# Altium PCB Secondary Protection.PcbDoc
Units mil, origin at the board's own origin, x right, y up, seen from the top; angles counter-clockwise.
Board outline 810 x 4415 mil, 2 copper layers (Top Layer, Bottom Layer), stack 62 mil thick; 47 components, 39 nets, 131 pads, 15 vias.
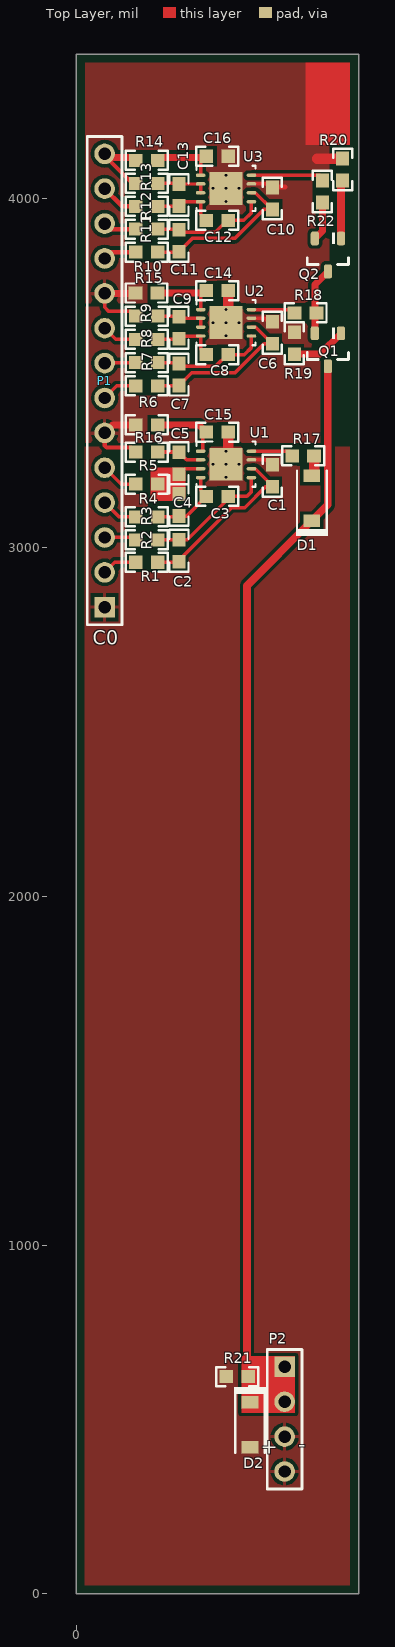
[diagram p0: Top Layer view]
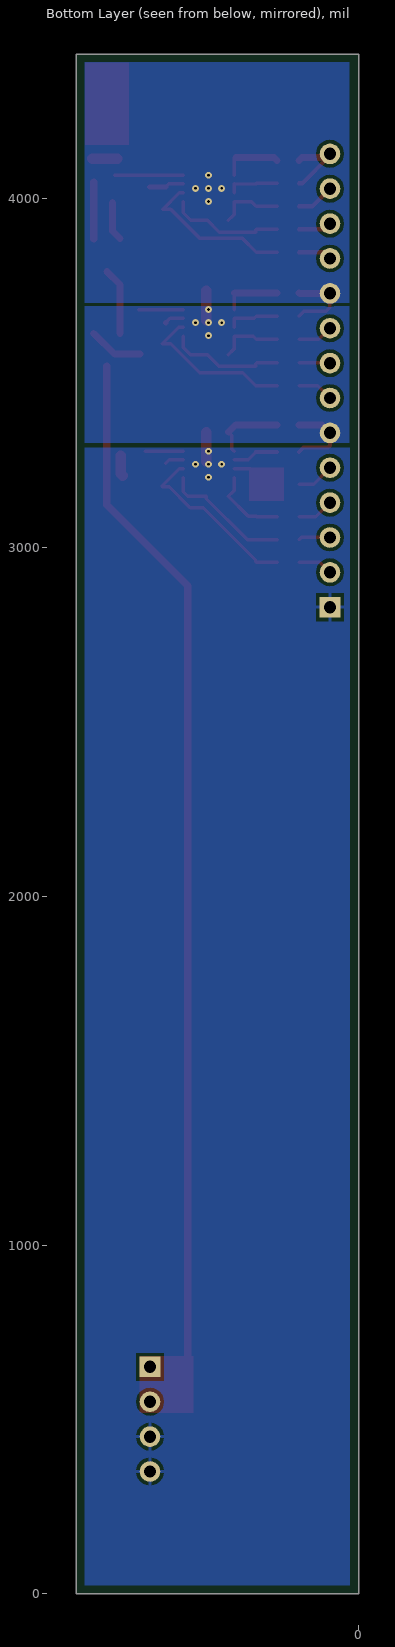
[diagram p1: Bottom Layer view, seen from below]

## Layer stack, top to bottom
Top Solder: solder mask 0.4, Solder Resist, Dk 3.5
Top Layer: signal copper 1.4
Dielectric1: core 59.2, FR-4, Dk 4.8
Bottom Layer: signal copper 1.4
Bottom Solder: solder mask 0.4, Solder Resist, Dk 3.5

## Board outline
0,0 0,4415 810,4415 810,0

## Design rules (kind name [scope] priority, off if disabled: settings)
AcuteAngle [All] p1: minimum=4.50000000000000E+0001 checktracksonly=FALSE
AssemblyTestPointUsage [All] p1: valid=2
BoardOutlineClearance BoardOutlineClearance_MountingHoles [OnCopper and InComponentClass('Mounting Holes')] p1: gap=40 ignorepadtopadclearanceinfootprint=FALSE
BoardOutlineClearance BoardOutlineClearance_Poly [OnCopper and IsPoly] p2: gap=25 ignorepadtopadclearanceinfootprint=FALSE
BoardOutlineClearance [OnCopper and Not InComponentClass('Logo') and not InComponentClass('FiducialMark') and not InRegion(1000,500,4000,800) and not InPoly] p3: gap=10 ignorepadtopadclearanceinfootprint=FALSE
Clearance Clearance_Keepouts [((IsTrack Or IsArc) And Not InPoly) And IsFree and IsKeepOut vs ((IsTrack Or IsArc) And Not InPoly) And IsFree and IsKeepOut] p1: gap=2 ignorepadtopadclearanceinfootprint=FALSE
Clearance Clearance_Poly [InPolygon] p2: gap=10 ignorepadtopadclearanceinfootprint=FALSE
Clearance Clearance_FiducialMark [IsKeepOut and InComponentClass('FiducialMark') vs IsPad and InComponentClass('FiducialMark')] p3: gap=0 ignorepadtopadclearanceinfootprint=FALSE
Clearance [All] p4: gap=8 ignorepadtopadclearanceinfootprint=FALSE
ComponentClearance ComponentClearance_MountingHoles_FiducialMarks [InComponentClass('Mounting Holes') vs InComponentClass('FiducialMark')] p1 off: gap=50 collisioncheckmode=3 verticalgap=10 showdistances=FALSE
ComponentClearance ComponentClearance_Shunt [InComponentClass('Header') vs InComponentClass('Shunt')] p2 off: gap=0 collisioncheckmode=3 verticalgap=0 showdistances=FALSE
ComponentClearance ComponentClearance_Logo [InComponentClass('Logo')] p3 off: gap=50 collisioncheckmode=3 verticalgap=10 showdistances=FALSE
ComponentClearance ComponentClearance_ScrewToNut [(HasFootprint('NY PMS 440 0025 PH')) vs (HasFootprint('Keystone_1902C'))] p4 off: gap=5 collisioncheckmode=3 verticalgap=10 showdistances=FALSE
ComponentClearance ComponentClearance_MountingHoles [InComponentClass('Mounting Holes')] p5 off: gap=250 collisioncheckmode=3 verticalgap=100000 showdistances=FALSE
ComponentClearance ComponentClearance_SmallPassives [HasFootprint('0201*') or HasFootprint('0402*') or HasFootprint('0508') or HasFootprint('0603*') or HasFootprint('0612') or HasFootprint('0805*') or HasFootprint('0815*') or HasFootprint('0830*') or HasFootprint('1206*') or HasFootprint('1210*') or HasFootprint('1808*') or HasFootprint('1812*') or HasFootprint('1825*') or HasFootprint('2010*') or HasFootprint('2220*') or HasFootprint('2225*') or HasFootprint('2512*') or HasFootprint('2728*') or HasFootprint('3518*') vs HasFootprint('0201*') or HasFootprint('0402*') or HasFootprint('0508') or HasFootprint('0603*') or HasFootprint('0612') or HasFootprint('0805*') or HasFootprint('0815*') or HasFootprint('0830*') or HasFootprint('1206*') or HasFootprint('1210*') or HasFootprint('1808*') or HasFootprint('1812*') or HasFootprint('1825*') or HasFootprint('2010*') or HasFootprint('2220*') or HasFootprint('2225*') or HasFootprint('2512*') or HasFootprint('2728*') or HasFootprint('3518*')] p6 off: gap=14.96 collisioncheckmode=3 verticalgap=10 showdistances=FALSE
ComponentClearance ComponentClearance_THtoSMT [IsThruComponent vs IsSMTComponent] p7 off: gap=40 collisioncheckmode=3 verticalgap=30 showdistances=FALSE
ComponentClearance ComponentClearance_THtoTH [IsThruComponent vs IsThruComponent] p8 off: gap=30 collisioncheckmode=3 verticalgap=30 showdistances=FALSE
ComponentClearance [All] p9 off: gap=30 collisioncheckmode=3 verticalgap=10 showdistances=FALSE
DiffPairsRouting [All] p1: maxlimit=100 minlimit=10 mostfreqgap=10 toplayer_minwidth=15 toplayer_maxwidth=15 toplayer_prefwidth=15 bottomlayer_minwidth=15 bottomlayer_maxwidth=15 bottomlayer_prefwidth=15 maxuncoupledlength=1000
FabricationTestPointUsage TestPointUsage [All] p1: valid=2 allowmultiple=FALSE
FabricationTestpoint Testpoint [All] p1: side=3 testpointundercomponent=TRUE minsize=40 maxsize=100 preferedsize=60 minholesize=0 maxholesize=40 preferedholesize=32 testpointgrid=1 allowsidetop=TRUE allowsidebottom=TRUE usegrid=TRUE gridtolerance=0.01
FanoutControl Fanout_LCC [IsLCC] p1: bgadir=Out bgaviamode=Centered fanoutstyle=Auto fanoutdirection=Alternating viagrid=1 // Fanout_LCC (Default Rule)
FanoutControl Fanout_BGA [IsBGA] p2: bgadir=Out bgaviamode=Centered fanoutstyle=Auto fanoutdirection=Alternating viagrid=1 // Fanout_BGA (Default Rule)
FanoutControl Fanout_Default [All] p4: bgadir=Out bgaviamode=Centered fanoutstyle=Auto fanoutdirection=Alternating viagrid=1 // Fanout_Default (Default Rule)
FanoutControl Fanout_Small [(CompPinCount < 5)] p5: bgadir=Out bgaviamode=Centered fanoutstyle=Auto fanoutdirection=OutThenIn viagrid=1 // Fanout_Small (Default Rule)
HoleSize [All] p1: absolutevalues=TRUE maxlimit=251 minlimit=7.87 maxpercent=80.000 minpercent=20.000
MinimumAnnularRing MinimumAnnularRing_ThermalPadVias [IsVia and InAnyComponent] p1: minimumring=5.91
MinimumAnnularRing [All] p2: minimumring=8
MinimumSolderMaskSliver MinimumSolderMaskSliver_Logo [InComponentClass('Logo') vs InComponentClass('Logo')] p1: minsoldermaskwidth=0.7
MinimumSolderMaskSliver [All] p2 off: minsoldermaskwidth=3.94
PlaneClearance [All] p1: clearance=10
PlaneConnect [All] p1: planeconnectstyle=Direct reliefexpansion=10 reliefentries=4 reliefconductorwidth=10 reliefairgap=10
PolygonConnect [All] p1: thpad.connectstyle=Relief thpad.reliefconductorwidth=10 thpad.reliefentries=4 thpad.polygonreliefangle="90 Angle" thpad.airgapwidth=10 smdpad.connectstyle=Direct smdpad.reliefconductorwidth=10 smdpad.reliefentries=4 smdpad.polygonreliefangle="90 Angle" smdpad.airgapwidth=10 via.connectstyle=Direct via.reliefconductorwidth=10 via.reliefentries=4 via.polygonreliefangle="90 Angle" via.airgapwidth=10
RoutingVias ThermalPadVias [IsVia and InAnyComponent] p1: holewidth=7.87 width=19.68 viastyle="Through Hole" minholewidth=7.87 minwidth=19.68 maxholewidth=12.99 maxwidth=23.62
RoutingVias [All] p2: holewidth=16 width=34 viastyle="Through Hole" minholewidth=7.87 minwidth=26 maxholewidth=40 maxwidth=65
SilkToBoardRegionClearance [Not ((IsComment or IsDesignator) And (Hide <> 'False')) and not InRegion(1000,500,4000,800)] p1:
SilkToSilkClearance SilkToSilkClearance_Pb-FreeLogo [(HasFootprint('Pb-Free_Overlay_Medium') OR HasFootprint('Pb-Free_Overlay_Small')) vs (HasFootprint('Pb-Free_Overlay_Medium') OR HasFootprint('Pb-Free_Overlay_Small'))] p1 off: silktosilkclearance=0
SilkToSilkClearance [All] p2 off: silktosilkclearance=4
SilkToSolderMaskClearance SilkToComponentPadClearance [(IsPad or IsFill or IsRegion) and InAnycomponent] p1: minsilkscreentomaskgap=5 clearancetoexposedcopper=TRUE
SilkToSolderMaskClearance "Silk to Solder Mask Opening" [All] p2: minsilkscreentomaskgap=4 clearancetoexposedcopper=FALSE
SolderMaskExpansion [All] p1: expansion=1.97
Width [All] p1: maxlimit=100 minlimit=6 preferedwidth=10 checkconnectedcopper=TRUE
14 further rules are at their usual default settings.

## Classes and differential pairs
component class EVM_Hardware: !PCB1

## Components (designator, comment, footprint, x,y, rotation, side; value= is the part's Value field where it differs from the comment)
C1 "GRM188R71H104KA93D" 0603 563,3206 r90 top value=0.1uF
C2 "GRM188R71H104KA93D" 0603 295,2991 r270 top value=0.1uF
C3 "GRM188R71H104KA93D" 0603 405,3147 r0 top value=0.1uF
C4 "GRM188R71H104KA93D" 0603 295,3122 r270 top value=0.1uF
C5 "GRM188R71H104KA93D" 0603 295,3242 r270 top value=0.1uF
C6 "GRM188R71H104KA93D" 0603 563,3616 r90 top value=0.1uF
C7 "GRM188R71H104KA93D" 0603 295,3496 r270 top value=0.1uF
C8 "GRM188R71H104KA93D" 0603 405,3553 r0 top value=0.1uF
C9 "GRM188R71H104KA93D" 0603 295,3630 r270 top value=0.1uF
C10 "GRM188R71H104KA93D" 0603 563,4001 r90 top value=0.1uF
C11 "GRM188R71H104KA93D" 0603 295,3880 r270 top value=0.1uF
C12 "GRM188R71H104KA93D" 0603 405,3938 r0 top value=0.1uF
C13 "GRM188R71H104KA93D" 0603 295,4011 r270 top value=0.1uF
C14 "GRM188R71H104KA93D" 0603 405,3737 r0 top value=0.1uF
C15 "GRM188R71H104KA93D" 0603 405,3331 r0 top value=0.1uF
C16 "GRM188R71H104KA93D" 0603 405,4122 r0 top value=0.1uF
D1 "BAT42W-7-F" SOD-123 676,3141 r90 top value=30V
D2 "BZT52C16-7-F" SOD-123 499,485 r270 top value=16V
P1 "Header 14" HDR1X14 82,2829 r90 top
P2 "Header 4" HDR1X4 598,651 r270 top
Q1 "MMBT3906-7-F" SOT-23 722,3567.03 r270 top value="40 V"
Q2 "MMBT3906-7-F" SOT-23 722,3839 r270 top value="40 V"
R1 "CRCW06031K00FKEA" 0603 202.33,2958 r180 top value=1.00k
R2 "CRCW06031K00FKEA" 0603 202.33,3022 r180 top value=1.00k
R3 "CRCW06031K00FKEA" 0603 202.33,3088 r180 top value=1.00k
R4 "CRCW06031K00FKEA" 0603 202.33,3182 r180 top value=1.00k
R5 "CRCW06031K00FKEA" 0603 202.33,3274 r180 top value=1.00k
R6 "CRCW06031K00FKEA" 0603 202.33,3463.54 r180 top value=1.00k
R7 "CRCW06031K00FKEA" 0603 202.33,3530.17 r180 top value=1.00k
R8 "CRCW06031K00FKEA" 0603 202.33,3596.8 r180 top value=1.00k
R9 "CRCW06031K00FKEA" 0603 202.33,3663.43 r180 top value=1.00k
R10 "CRCW06031K00FKEA" 0603 202.33,3847 r180 top value=1.00k
R11 "CRCW06031K00FKEA" 0603 202.33,3912.81 r180 top value=1.00k
R12 "CRCW06031K00FKEA" 0603 202.33,3978.62 r180 top value=1.00k
R13 "CRCW06031K00FKEA" 0603 202.33,4044.43 r180 top value=1.00k
R14 "CRCW06031K00FKEA" 0603 202.33,4110.24 r180 top value=1.00k
R15 "CRCW06031K00FKEA" 0603 202,3730 r0 top value=1.00k
R16 "CRCW06031K00FKEA" 0603 202.33,3352 r0 top value=1.00k
R17 "CRCW0603200RJNEA" 0603 651,3263 r0 top value=200
R18 "CRCW060313K3FKEA" 0603 658,3673 r0 top value=13.3k
R19 "CRCW060320K0FKEA" 0603 626,3586 r270 top value=20.0k
R20 "CRCW060320K0FKEA" 0603 764,4084 r270 top value=20.0k
R21 "CRCW060315K0JNEA" 0603 462,623 r180 top value=15k
R22 "CRCW060313K3FKEA" 0603 706,4021 r270 top value=13.3k
U1 "BQ771801DPJT" DPJ0008A 430,3239 r0 top
U2 "BQ771801DPJT" DPJ0008A 430,3645 r0 top
U3 "BQ771801DPJT" DPJ0008A 430,4030 r0 top

## Footprints (in the part's own frame and the unit in brackets; to place one, negate y for a bottom-side part, rotate by r counter-clockwise, add the part's x,y. Pads: shape width x height; smd on the part's side, far side on the other; paste and mask are expansions set on the pad)
0603 [mm] "0603 from SM-752 data"
  rect 1x0.95 smd: 1(-0.8,0) 2(0.8,0)
  silkscreen extent -1.52,-0.69 1.52,0.69, body extent -0.87,-0.47 0.87,0.47, height 1
DPJ0008A [mm]
  oval 0.7x0.25 smd: 1(-1.85,0.95) 2(-1.85,0.325) 3(-1.85,-0.325) 4(-1.85,-0.975) 5(1.85,-0.975) 6(1.85,-0.325) 7(1.85,0.325) 8(1.85,0.95)
  rect 2.4x2.4 smd paste-1.2: 9(0,0)
  silkscreen extent -2.15,-1.65 2.15,1.65, body extent -2.05,-1.55 2.05,1.55, height 0.81
HDR1X4 [mm] "Connector; Header; 4 Position"
  rect 1.5x1.5 hole 0.9: 1(0,0)
  round 1.5 hole 0.9: 2(2.54,0) 3(5.08,0) 4(7.62,0)
  silkscreen extent -1.27,-1.27 8.89,1.27
HDR1X14 [mm] "Connector; Header; 14 Position"
  rect 1.5x1.5 hole 0.9: 1(0,0)
  round 1.5 hole 0.9: 2(2.54,0) 3(5.08,0) 4(7.62,0) 5(10.16,0) 6(12.7,0) 7(15.24,0) 8(17.78,0) 9(20.32,0) 10(22.86,0) 11(25.4,0) 12(27.94,0) 13(30.48,0) 14(33.02,0)
  silkscreen extent -1.27,-1.27 34.29,1.27
SOD-123 [mm] "On Semi recommended land pattern"
  rect 0.915x1.22 smd: 1(-1.637,0) 2(1.637,0)
  silkscreen extent -2.74,-1.17 2.03,1.17, body extent -1.93,-0.9 1.93,0.9, height 1.35
SOT-23 [mm] "SOT23, 3-Leads, Body 2.9x1.3mm, Pitch 0.95mm, Lead Span 2.5mm, IPC Medium Density"
  rrect50% 1x0.6 smd: 1(-1.2,0.95) 2(-1.2,-0.95) 3(1.2,0)
  silkscreen extent -1.63,-1.5 0.7,1.5, body extent -1.16,-1.45 1.21,1.45, height 1

## Part data
C1 C2 C3 C4 C5 C6 C7 C8 C9 C10 C11 C12 C13 C14 C15 C16: "CAP, CERM, 0.1 μF, 50 V,+/- 10%, X7R, 0603", Cap_Case=0603, Manufacturer=MuRata, Supplier Part Number 1=490-1519-1-ND, TempCo=X7R, Tolerance_%=10, Value2=50V, ValueDisplayed=0.1μF, AEC Category=Q200, AEC Qualified=?, Cap_F=0.0000001, ComponentLink1Description="Datasheet link", ComponentLink1URL=http://search.murata.co.jp/Ceramy/PnsearchViewAction.do?HnOFG=ON&HnNFG=ON&SEL_CNT=50&sLang=en&sKey=GRM188R71H104KA93D&x=9&y=9&search=startwith, CompType=Capacitor, Green_EU RoHS=Passed, Green_EU RoHS-2=Incomplete, Green_Lifecycle=Active, Green_REACh=Passed, LatestRevisionDate=2017-06-22, MountType=SMT, PackageReference=0603, PartNumber=GRM188R71H104KA93D, Polarized=N, Published=2008-06-19, Publisher="Texas Instruments", RoHS=Y, SizeArea_mm2=1.28, SizeAreaWB_mm2=4.68, SizeX_mm=1.6, SizeY_mm=0.8, SizeZ_mm=1, Supplier 1=Digi-Key, Supplier 2=Mouser, Supplier 3=Farnell, Supplier Part Number 2=81-GRM39X104K50D, Supplier Part Number 3=8820023, SymbolVersion=2008-07-09, TaMax_C=125, TaMin_C=-55, Technology=Ceramic, U/M=EA, VDC_V=50
D1: "Diode, Schottky, 30 V, 0.2 A, SOD-123", Manufacturer="Diodes Inc.", Supplier Part Number 1=BAT42WDICT-ND, Value1=0.2A, Value2=1V, AEC Category=Q101, AEC Qualified=?, ComponentLink1Description="Datasheet link", ComponentLink1URL=http://www.diodes.com/datasheets/ds30016.pdf, CompType=Diode, Green_EU RoHS=Incomplete, Green_EU RoHS-2=Incomplete, Green_Lifecycle="Not Set", Green_REACh=Incomplete, Io_A=0.2, LatestRevisionDate=2017-06-26, MountType=SMT, PackageReference=SOD-123, PartNumber=BAT42W-7-F, Published=2008-06-26, Publisher="Texas Instruments", RoHS=Y, SizeArea_mm2=6.545, SizeAreaWB_mm2=13.095, SizeX_mm=3.85, SizeY_mm=1.7, SizeZ_mm=1.35, Supplier 1=Digi-Key, Supplier 2=Mouser, Supplier 3=Farnell, Supplier Part Number 2=621-BAT42W-F, Supplier Part Number 3=1843718, SymbolVersion=2008-12-08, Type=Schottky, U/M=EA, Vf_V=1, Vr_V=30
D2: "Diode, Zener, 16 V, 500 mW, AEC-Q101, SOD-123", Manufacturer="Diodes Inc.", Power_W=0.5, Supplier Part Number 1=BZT52C16-FDICT-ND, Value1=0.5W, AEC Category=Q101, AEC Qualified=Y, ComponentLink1Description="Datasheet link", ComponentLink1URL=http://www.diodes.com/_files/datasheets/ds18004.pdf, CompType=Zener, LatestRevisionDate=2017-06-20, LatestRevisionNote="Updated Supplier Data", MountType=SMT, PackageReference=SOD-123, PartNumber=BZT52C16-7-F, Published=2008-10-08, Publisher="Texas Instruments", RJA_CperW=338, RoHS=Y, SizeArea_mm2=6.545, SizeAreaWB_mm2=13.095, SizeX_mm=3.85, SizeY_mm=1.7, SizeZ_mm=1.35, Supplier 1=Digi-Key, Supplier 2=Mouser, Supplier Part Number 2=621-BZT52C16-F, SymbolCreator=a0412235, SymbolVersion=2010-08-25, U/M=EA, Vr_V=N/A, Vz_V=16
P1: "Header, 14-Pin", LatestRevisionDate=17-Jul-2002, LatestRevisionNote="Re-released for DXP Platform.", Publisher="Altium Limited"
P2: "Header, 4-Pin", LatestRevisionDate=17-Jul-2002, LatestRevisionNote="Re-released for DXP Platform.", Publisher="Altium Limited"
Q1 Q2: library part "MMBT3906-7-F, Diodes Inc.", "Transistor, PNP, 40 V, 0.2 A, SOT-23", Manufacturer="Diodes Inc.", Supplier Part Number 1=MMBT3906-FDICT-ND, Value1="0.2 A", Value2=400, AEC Category=Q101, AEC Qualified=?, ComponentLink1Description="Datasheet link", ComponentLink1URL=http://www.diodes.com/datasheets/ds30059.pdf, CompType=BJT, Green_EU RoHS=Passed, Green_EU RoHS-2=Passed, Green_Lifecycle=Active, Green_REACh=Passed, HfeMax=400, IcRated_A=0.2, LatestRevisionDate=2017-06-09, MountType=SMT, NPN=0, PackageReference=SOT-23, PartNumber=MMBT3906-7-F, PNP=1, Published=2008-07-31, Publisher="Texas Instruments", RoHS=Y, SizeArea_mm2=7.5, SizeAreaWB_mm2=14, SizeX_mm=2.5, SizeY_mm=3, SizeZ_mm=1.1, Supplier 1=Digi-Key, Supplier 2=Newark, Supplier 3=Farnell, Supplier Part Number 2=51R6815, Supplier Part Number 3=1773629, SymbolVersion=2008-07-31, TaMax_C=150, TaMin_C=-55, U/M=EA, Vceo_V=40, Vcesat1_V=0.25
R1 R2 R3 R4 R5 R6 R7 R8 R9 R10 R11 R12 R13 R14 R15 R16: "RES, 1.00 k, 1%, 0.1 W, 0603", Manufacturer=Vishay-Dale, Power_W=0.1, Supplier Part Number 1=541-1.00KHCT-ND, TempCo="100 ppm/C", Tolerance_%=1, Value1=1%, Value2=0.1W, Value_Code=1k00, ValueDisplayed=1.00k, AEC Category=Q200, AEC Qualified=?, ComponentLink1Description="Datasheet link", ComponentLink1URL=http://www.vishay.com/docs/20035/dcrcwe3.pdf, CompType=Resistor, EIA_Code=E96, Green_EU RoHS="Passed with Exemption", Green_EU RoHS-2=Passed, Green_Lifecycle=Active, Green_REACh=Passed, LatestRevisionDate=2017-06-13, MountType=SMT, PackageReference=0603, PartNumber=CRCW06031K00FKEA, Published=2008-06-26, Publisher="Texas Instruments", Res_ohm=1000, RoHS=Y, SizeArea_mm2=1.28, SizeX_mm=1.6, SizeY_mm=0.8, SizeZ_mm=1, Supplier 1=Digi-Key, Supplier 2=Newark, Supplier 3=Mouser, Supplier Part Number 2=52K8015, Supplier Part Number 3=71-CRCW0603-1.0K-E3, SymbolVersion=2009-05-29, Technology="Thick Film", U/M=EA, VDC_V=75
R17: "RES, 200, 5%, 0.1 W, 0603", Manufacturer=Vishay-Dale, Power_W=0.1, Supplier Part Number 1=541-200GCT-ND, TempCo="200 ppm/C", Tolerance_%=5, Value1=5%, Value2=0.1W, Value_Code=200R, ValueDisplayed=200, AEC Category=Q200, AEC Qualified=?, ComponentLink1Description="Datasheet link", ComponentLink1URL=http://www.vishay.com/docs/20035/dcrcwe3.pdf, CompType=Resistor, EIA_Code=E24, Green_EU RoHS="Passed with Exemption", Green_EU RoHS-2=Passed, Green_Lifecycle=Active, Green_REACh=Passed, LatestRevisionDate=2017-06-13, MountType=SMT, PackageReference=0603, PartNumber=CRCW0603200RJNEA, Published=2008-06-26, Publisher="Texas Instruments", Res_ohm=200, RoHS=Y, SizeArea_mm2=1.28, SizeX_mm=1.6, SizeY_mm=0.8, SizeZ_mm=1, Supplier 1=Digi-Key, Supplier 2=Newark, Supplier 3=Mouser, Supplier Part Number 2=59M6785, Supplier Part Number 3=71-CRCW0603J-200-E3, SymbolVersion=2009-05-29, Technology="Thick Film", U/M=EA, VDC_V=75
R18 R22: "RES, 13.3 k, 1%, 0.1 W, 0603", Manufacturer=Vishay-Dale, Power_W=0.1, Supplier Part Number 1=541-13.3KHCT-ND, TempCo="100 ppm/C", Tolerance_%=1, Value1=1%, Value2=0.1W, Value_Code=13k3, ValueDisplayed=13.3k, AEC Category=Q200, AEC Qualified=?, ComponentLink1Description="Datasheet link", ComponentLink1URL=http://www.vishay.com/docs/20035/dcrcwe3.pdf, CompType=Resistor, EIA_Code=E96, Green_EU RoHS="Passed with Exemption", Green_EU RoHS-2=Passed, Green_Lifecycle=Active, Green_REACh=Passed, LatestRevisionDate=2017-06-13, MountType=SMT, PackageReference=0603, PartNumber=CRCW060313K3FKEA, Published=2008-06-26, Publisher="Texas Instruments", Res_ohm=13300, RoHS=Y, SizeArea_mm2=1.28, SizeX_mm=1.6, SizeY_mm=0.8, SizeZ_mm=1, Supplier 1=Digi-Key, Supplier 2=Newark, Supplier 3=Mouser, Supplier Part Number 2=52K8122, Supplier Part Number 3=71-CRCW0603-13.3K-E3, SymbolVersion=2009-05-29, Technology="Thick Film", U/M=EA, VDC_V=75
R19 R20: "RES, 20.0 k, 1%, 0.1 W, 0603", Manufacturer=Vishay-Dale, Power_W=0.1, Supplier Part Number 1=541-20.0KHCT-ND, TempCo="100 ppm/C", Tolerance_%=1, Value1=1%, Value2=0.1W, Value_Code=20k0, ValueDisplayed=20.0k, AEC Category=Q200, AEC Qualified=?, ComponentLink1Description="Datasheet link", ComponentLink1URL=http://www.vishay.com/docs/20035/dcrcwe3.pdf, CompType=Resistor, EIA_Code=E96, Green_EU RoHS="Passed with Exemption", Green_EU RoHS-2=Passed, Green_Lifecycle=Active, Green_REACh=Passed, LatestRevisionDate=2017-06-13, MountType=SMT, PackageReference=0603, PartNumber=CRCW060320K0FKEA, Published=2008-06-26, Publisher="Texas Instruments", Res_ohm=20000, RoHS=Y, SizeArea_mm2=1.28, SizeX_mm=1.6, SizeY_mm=0.8, SizeZ_mm=1, Supplier 1=Digi-Key, Supplier 2=Newark, Supplier 3=Mouser, Supplier Part Number 2=52K8267, Supplier Part Number 3=71-CRCW0603-20K-E3, SymbolVersion=2009-05-29, Technology="Thick Film", U/M=EA, VDC_V=75
R21: "RES, 15 k, 5%, 0.1 W, 0603", Manufacturer=Vishay-Dale, Power_W=0.1, Supplier Part Number 1=541-15KGCT-ND, TempCo="200 ppm/C", Tolerance_%=5, Value1=5%, Value2=0.1W, Value_Code=15k0, ValueDisplayed=15k, AEC Category=Q200, AEC Qualified=?, ComponentLink1Description="Datasheet link", ComponentLink1URL=http://www.vishay.com/docs/20035/dcrcwe3.pdf, CompType=Resistor, EIA_Code=E24, Green_EU RoHS="Passed with Exemption", Green_EU RoHS-2=Passed, Green_Lifecycle=Active, Green_REACh=Passed, LatestRevisionDate=2017-06-13, MountType=SMT, PackageReference=0603, PartNumber=CRCW060315K0JNEA, Published=2008-06-26, Publisher="Texas Instruments", Res_ohm=15000, RoHS=Y, SizeArea_mm2=1.28, SizeX_mm=1.6, SizeY_mm=0.8, SizeZ_mm=1, Supplier 1=Digi-Key, Supplier 2=Newark, Supplier 3=Mouser, Supplier Part Number 2=59M6768, Supplier Part Number 3=71-CRCW0603J-15K-E3, SymbolVersion=2009-05-29, Technology="Thick Film", U/M=EA, VDC_V=75
U1 U2 U3: library part CMP-0078897-2, "Family 2-5S Overvoltage Protector with Internal Delay Timer, DPJ0008A (WSON-8)", Alternate Manufacturer="Texas Instruments", Alternate PartNumber=BQ771801DPJR, AEC Category=Q200, AEC Qualified=N, ComponentLink1Description="Datasheet Link", ComponentLink1URL=http://www.ti.com/lit/ds/symlink/bq7718.pdf, ComponentLink2Description="Product Folder", ComponentLink2URL=http://www.ti.com/product/bq7718, CompType=IC, Manufacturer="Texas Instruments", MountType=SMT, PackageDescription=WSON-8, PackageReference=DPJ0008A, PartNumber=BQ771801DPJT, RoHS=Y, SizeArea_mm2=12, SizeAreaWB_mm2=20, SizeX_mm=4, SizeY_mm=3, SizeZ_mm=0.8

## Via types
v1: diameter 19.68, hole 7.87, Top Layer to Bottom Layer, 15 vias

## Nets (pads, with @x,y where several pads share a name; then routed paths per layer and width w, separated by ;. In a path a pad name is that pad's centre, name@x,y a point inside that pad or via, vN(x,y) a via of type N, cw(c..) or ccw(c..) an arc to the next point about the centre after c; other vN are vias at no path point)
GND: C1.2 C15.2 D2.2 P1.1 P2.3 P2.4 R21.2 U1.7 U1.9 | length 139.9
  Top Layer w10: U1.7 542.7,3251.8 C1.2@553,3241.5
  Top Layer w30: U1.9@436.5,3245.5 C15.2
  other v1: 430,3201.6 392.6,3239 430,3239 467.4,3239 430,3276.4
NetC1_1: C1.1 C2.2 R1.1 U1.6 | length 504.5
  Top Layer w10: R1.1 293.5,2958 C2.2 295,2964 445.75,3114.75 483.21,3114.75 542.96,3174.5 C1.1 563,3177 513.8,3226.2 U1.6
NetC2_1: C2.1 C3.2 R2.1 U1.5 | length 370.7
  Top Layer w10: R2.1 294.5,3022 C2.1 318.5,3022.5 436.5,3140.5 C3.2 490,3147 502.83,3159.83 U1.5
NetC3_1: C3.1 C4.2 R3.1 U1.4 | length 224.5
  Top Layer w10: R3.1 292.5,3088 C4.2 317.01,3090.5 C3.1 357.17,3163.34 U1.4
NetC4_1: C4.1 C5.2 R4.1 U1.3 | length 68.7
  Top Layer w10: C5.2 310.7,3226.2 U1.3
NetC5_1: C5.1 R5.1 U1.2 | length 132.5
  Top Layer w10: C5.1 316.7,3251.8 U1.2
  Top Layer w12: R5.1 294.5,3274 C5.1
NetC6_1: C6.1 C7.2 R6.1 U2.6 | length 459.2
  Top Layer w10: R6.1 294.03,3463.54 C7.2 331.8,3501.3 455.76,3501.3 538.96,3584.5 C6.1 515.3,3632.2 U2.6
NetC6_2: C6.2 C14.2 P1.6 R5.2 R16.1 R19.1 U2.7 U2.9 | length 373.7
  Top Layer w10: U2.7 540.7,3657.8 C6.2@553,3645.5
  Top Layer w12: P1.6 82,3293 88,3287 157.83,3287 R5.2
  Top Layer w15: C6.2@553,3643.64 C6.2@553,3645.5
  Top Layer w20: P1.6 105,3352 R16.1
  Top Layer w30: U2.9@436.5,3651.5 C14.2
  other v1: 430,3607.6 392.6,3645 430,3645 467.4,3645 430,3682.4
NetC7_1: C7.1 C8.2 R7.1 U2.5 | length 333.7
  Top Layer w10: R7.1 292.33,3530.17 C7.1 295,3519.3 399.4,3519.3 433.1,3553 C8.2 482,3553 502.83,3573.83 U2.5
NetC8_1: C8.1 C9.2 R8.1 U2.4 | length 187.8
  Top Layer w10: R8.1 293.3,3596.8 C9.2 303.11,3606.61 U2.4 357.17,3569.34 C8.1
NetC9_1: C9.1 R9.1 U2.2 U2.3 | length 151.3
  Top Layer w10: R9.1 293.06,3663.43 C9.1 298.7,3657.8 U2.2 U2.3
NetC10_1: C10.1 C11.2 R10.1 U3.6 | length 457.8
  Top Layer w10: R10.1 293.5,3847 C11.2 332.8,3886.3 454.76,3886.3 537.96,3969.5 561.98,3969.5 514.28,4017.2 U3.6
NetC10_2: C10.2 C16.2 P1.10 R9.2 R15.1 R20.1 U3.7 U3.9 | length 400.3
  Top Layer w10: P1.10 82,3689.13 94.13,3677 157.26,3677 R9.2 ; U3.7 543.7,4042.8 C10.2@553,4033.5
  Top Layer w15: C10.2@553,4033.5 598.5,4033.5
  Top Layer w20: P1.10 169.5,3729 R15.1
  Top Layer w30: 691.5,4115.5 R20.1
  other v1: 430,3992.6 392.6,4030 430,4030 467.4,4030 430,4067.4
NetC11_1: C11.1 C12.2 R11.1 U3.5 | length 331.5
  Top Layer w10: R11.1 293.69,3912.81 C11.1 295,3904.3 399.4,3904.3 433.1,3938 C12.2 481,3938 502.83,3959.83 U3.5
NetC12_1: C12.1 C13.2 R12.1 U3.4 | length 189.1
  Top Layer w10: R12.1 294.11,3978.62 C13.2 307.11,3991.61 U3.4 357.17,3954.34 C12.1
NetC13_1: C13.1 R13.1 U3.2 U3.3 | length 149.9
  Top Layer w10: R13.1 293.07,4044.43 C13.1 356.87,4042.5 U3.2 U3.3
NetC14_1: C14.1 R15.2 U2.1 | length 170.6
  Top Layer w10: C14.1@356,3730 357.17,3728.83 U2.1
  Top Layer w20: R15.2 C14.1@356,3730
NetC15_1: C15.1 R16.2 U1.1 | length 209.7
  Top Layer w10: U1.1 363,3282.24 363,3320.5 C15.1
  Top Layer w20: R16.2 352.5,3352 C15.1
NetC16_1: C16.1 R14.1 U3.1 | length 175.5
  Top Layer w10: 352,4119 357.17,4113.83 U3.1
  Top Layer w20: R14.1 242.59,4119 352,4119
NetD1_1: D1.1 D2.1 P2.1 P2.2 Q1.3 R21.1 | length 2989.4
  Top Layer w22: R21.1@490,626.5 490,2890.53 D1.1 722,3122.53 Q1.3
NetD1_2: D1.2 R17.2 | length 60.2
  Top Layer w30: D1.2 682.5,3211.96 R17.2
NetP1_2: P1.2 R1.2 | length 100.8
  Top Layer w10: P1.2 111,2958 R1.2
NetP1_3: P1.3 R2.2 | length 91.7
  Top Layer w10: P1.3 163.83,3029 R2.2
NetP1_4: P1.4 R3.2 | length 105.8
  Top Layer w10: P1.4 123,3088 R3.2
NetP1_5: P1.5 R4.2 | length 108.3
  Top Layer w10: P1.5 129,3182 R4.2
NetP1_7: P1.7 R6.2 | length 103.1
  Top Layer w10: P1.7 116.54,3463.54 R6.2
NetP1_8: P1.8 R7.2 | length 89.3
  Top Layer w10: P1.8 83.17,3530.17 R7.2
NetP1_9: P1.9 R8.2 | length 102.2
  Top Layer w10: P1.9 114.2,3596.8 R8.2
NetP1_11: P1.11 R10.2 | length 96.3
  Top Layer w12: P1.11 100,3847 R10.2
NetP1_12: P1.12 R11.2 | length 95.5
  Top Layer w12: P1.12 98.19,3912.81 R11.2
NetP1_13: P1.13 R12.2 | length 109.7
  Top Layer w12: P1.13 132.38,3978.62 R12.2
NetP1_14: P1.14 R13.2 R14.2 | length 223.4
  Top Layer w12: P1.14 82,4124 161.57,4044.43 R13.2
  Top Layer w20: P1.14 92,4119 162.07,4119 R14.2
NetQ1_1: Q1.1 R19.2 | length 158.2
  Top Layer w20: R19.2 699.64,3554.5 Q1.1
NetQ1_2: Q1.2 Q2.3 R18.2 | length 193
  Top Layer w20: Q1.2 684.6,3754.35 Q2.3
NetQ2_1: Q2.1 R20.2 | length 161.7
  Top Layer w22: Q2.1 R20.2@759.4,4047.91
NetQ2_2: Q2.2 R22.2 | length 112.1
  Top Layer w20: Q2.2 706,3907.65 R22.2
NetR17_1: R17.1 U1.8 | length 109.3
  Top Layer w10: U1.8 R17.1@612.1,3276.4
NetR18_1: R18.1 U2.8 | length 127.1
  Top Layer w10: U2.8 R18.1@629.91,3682.4
NetR22_1: R22.1 U3.8 | length 196.1
  Top Layer w10: U3.8 R22.1@698.91,4067.4

## Polygon pours and split planes (outlines as drawn)
NetC6_2 on Top Layer "TOP_LAYER_NETC6_2_P006" (solid, remove dead copper, pour order 6): 27,3691 785,3691 785,3300 27,3300
NetC10_2 on Top Layer "TOP_LAYER_NETC10_2_P012" (solid, remove dead copper, pour order 12): 27,4391 726,4391 726,3700 27,3700
GND on Top Layer "TOP_LAYER_GND_P016" (solid, remove dead copper, pour order 16): 25,3289 25,25.49 784.51,25.49 784.51,2308 784.51,3289
NetC10_2 on Bottom Layer "BOTTOM_LAYER_NETC10_2_P010" (solid, remove dead copper, pour order 10): 27,4391 785,4391 785,3700 27,3700
NetC6_2 on Bottom Layer "BOTTOM_LAYER_NETC6_2_P008" (solid, remove dead copper, pour order 8): 27,3692 785,3692 785,3300 27,3300
GND on Bottom Layer "BOTTOM_LAYER_GND_P002" (solid, remove dead copper, pour order 2): 25,3286 785,3286 785,25 25,25

## Keep-outs
Keep-Out Layer:
  text ".Layer_Name" at 577,-858.49 h60

## Other copper
Top Layer:
  rectangle net NetC4_1: 214,3134 313.7,3230
  rectangle net NetC10_2: 658,4155 785,4391
  region net NetD1_1: 628,519 628,682 474,682 474,519
  text ".Layer_Name" at 577,-858.49 h60
Bottom Layer:
  text ".Layer_Name" at 577,-858.49 h60

## Silkscreen, mask and mechanical layers (free items; w line width, h text height)
Top Overlay:
  text "C0" at 48,2722 h40
  text "-" at 637,394 h72.83
  text "+" at 529,388 h72.83
  text ".Layer_Name" at 577,-858.49 h60
Bottom Overlay:
  text ".Layer_Name" at 577,-858.49 h60
Top Paste:
  text ".Layer_Name" at 577,-858.49 h60
Bottom Paste:
  text ".Layer_Name" at 577,-858.49 h60
Top Solder:
  text ".Layer_Name" at 577,-858.49 h60
  text ".Layer_Name" at 577,-858.49 h60
Bottom Solder:
  text ".Layer_Name" at 577,-858.49 h60
Drill Guide:
  text ".Layer_Name" at 577,-858.49 h60
M1 Board Outline:
  lines w20: 18,0 18,4415 810,4415 810,0 18,0
  text ".Layer_Name" at 577,-858.49 h60
M2 Board Dimensions:
  rectangle: 0,-275 125,-150
  rectangle: 125,-400 500,-275
  lines w7: 0,-275 1000,-275 ; 125,-400 125,-150 ; 250,-400 250,-150 ; 500,-400 500,-150 ; 750,-400 750,-150 ; 0,-400 1000,-400 1000,-150 0,-150 0,-400
  text ".Layer_Name" at 577,-858.49 h60
M3 3D STEP Top:
  text ".Layer_Name" at 577,-858.49 h60
M4 3D STEP Bottom:
  text ".Layer_Name" at 577,-858.49 h60
M5 Assembly Top:
  lines w10: -292,-930.17 6308,-930.17 ; -292,-726.83 6310,-726.83 ; -292,-523.5 -292,-1133.5 3713,-1133.5 6310,-1133.5 6310,-523.5 -291.5,-523.5 -291.5,-1133.5 1284,-1133.5 ; 2173,-1133.5 2173,-523.5 ; 3440,-726.83 3440,-523.5 ; 4280,-726.83 4280,-523.5 ; 4902,-1140 4902,-937.17
  text "COMPONENTS MARKED 'DNP' SHOULD NOT BE POPULATED." at 1153.5,-318.5 h60
  text "ASSEMBLY VARIANT:" at 1153,-434 h60
  text ".VariantName" at 2189,-434 h60
  text "PCB VIEWED FROM TOP SIDE" at -228.5,-655.67 h60
  text "BOARD #:" at 2248,-655.67 h60
  text ".PRJ_Number" at 2793.5,-655.67 h60
  text "REV:" at 3638,-655.67 h60
  text ".PCB_Rev" at 3929.5,-655.67 h60
  text "SVN REV:" at 4476,-655.67 h60
  text ".VersionControl_RevNumber" at 4982,-655.67 h60
  text "TID #:" at 2248,-859 h60
  text ".TID" at 2793.5,-859 h60
  text "PLOT NAME =" at -228.5,-1064.34 h60
  text ".plot_File_Name" at 577,-1064.34 h60
  text "GENERATED    :" at 2250,-1064.34 h60
  text ".Print_Date" at 3119.5,-1064.34 h60
  text ".Print_Time" at 3848.5,-1064.34 h60
  text "TEXAS INSTRUMENTS" at 5113,-1064.34 h60
M6 Assembly Bottom:
  lines w10: -292.5,-727.33 6309.5,-727.33 ; -290.5,-930.67 6309.5,-930.67 ; 1115.5,-1140.5 1115.5,-937.67 ; 1737.5,-727.33 1737.5,-524 ; 2577.5,-727.33 2577.5,-524 ; 3844.5,-1134 3844.5,-524 ; 4733.5,-1134 6309,-1134 6309,-524 -292.5,-524 -292.5,-1134 2304.5,-1134 6309.5,-1134 6309.5,-524
  text "COMPONENTS MARKED 'DNP' SHOULD NOT BE POPULATED." at 6102,-318 h60
  text ".VariantName" at 5058,-434 h60
  text "ASSEMBLY VARIANT:" at 6097,-434 h60
  text ".VersionControl_RevNumber" at 1035.5,-656.17 h60
  text "SVN REV:" at 1541.5,-656.17 h60
  text ".PCB_Rev" at 2088,-656.17 h60
  text "REV:" at 2379.5,-656.17 h60
  text ".PRJ_Number" at 3224,-656.17 h60
  text "BOARD #:" at 3769.5,-656.17 h60
  text "PCB VIEWED FROM BOTTOM SIDE" at 6246,-656.17 h60
  text ".TID" at 3224,-859.5 h60
  text "TID #:" at 3769.5,-859.5 h60
  text "TEXAS INSTRUMENTS" at 904.5,-1064.84 h60
  text ".Print_Time" at 2169,-1064.84 h60
  text ".Print_Date" at 2898,-1064.84 h60
  text "GENERATED    :" at 3767.5,-1064.84 h60
  text ".plot_File_Name" at 5440.5,-1064.84 h60
  text "PLOT NAME =" at 6246,-1064.84 h60
M9 Title Sheet:
  drawing of 57 lines, arcs and shapes, not listed
  text "1" at 739.84,8036.5 h70
  text "2" at 3235.5,8036.5 h70
  text "3" at 5724.84,8036.5 h70
  text "4" at 8231.51,8036.5 h70
  text "5" at 10730.5,8036.5 h70
  text "6" at 13235.5,8036.5 h70
  text "A" at -416.5,6893.5 h70
  text "A" at 14383.5,6893.5 h70
  text "B" at -416.5,4513.5 h70
  text "B" at 14383.5,4513.5 h70
  text "C" at -416.5,2138.5 h70
  text "C" at 14383.5,2138.5 h70
  text "PROJECT TITLE:" at 11343.5,277.5 h45
  text ".PRJ_Title" at 11393.5,144.17 h70
  text "DESIGNED FOR:" at 11343.5,-23.5 h45
  text ".PRJ_Customer" at 11393.5,-163.5 h70
  text "D" at -416.5,-231.5 h70
  text "D" at 14383.5,-231.5 h70
  text "FILE NAME:" at 11343.5,-323.5 h45
  text ".PCB_File_Name_No_Path" at 11393.5,-443.5 h70
  text "Texas Instruments (TI) and/or its licensors do not warrant the accuracy or completeness of this specification" at 6374,-605.34 h45
  text "ENGINEER:" at 11343.5,-613.5 h45
  text "LAYOUT BY:" at 12848.5,-613.5 h45
  text "or any information contained therein. TI and/or its licensors do not warrant that this design will meet" at 6329.01,-718 h45
  text ".PRJ_Engineer" at 11393.5,-768.49 h70
  text ".PCB_Layout" at 12899,-768.49 h70
  text "the specifications, will be suitable for your application or fit for any particular purpose, or will operate in" at 6329.01,-830.67 h45
  text ".Layer_Name" at 577,-858.49 h60
  text "ALTIUM DESIGNER VERSION:" at 12848.5,-923.5 h45
  text "an implementation. TI and/or its licensors do not warrant that the design is production worthy. You should" at 6329.01,-943.33 h45
  text "completely validate and test your design implementation to confirm the system functionality for your application." at 6374,-1056 h45
  text ".print_Scale" at 11393.5,-1056.83 h70
  text ".Application_BuildNumber" at 12899,-1056.83 h70
  text "1" at 739.84,-1263.5 h70
  text "2" at 3235.5,-1263.5 h70
  text "3" at 5724.84,-1263.5 h70
  text "4" at 8231.51,-1263.5 h70
  text "5" at 10730.5,-1263.5 h70
  text "6" at 13235.5,-1263.5 h70
M10 Fab Notes:
  drawing of 189 lines, arcs and shapes, not listed
  text "DESIGN INFORMATION" at 12382.02,6356.17 h60
  text "MIN. TRACK WIDTH:" at 11737.46,6224.05 h60
  text "8" at 12833.7,6224.05 h60
  text "MIL" at 12988.46,6224.05 h60
  text "MIN. CLEARANCE:" at 11737.46,6099.92 h60
  text "0.2" at 12773.7,6099.93 h60
  text "mm" at 12988.46,6099.92 h60
  text "MIN. VIA PAD SIZE:" at 11737.46,5975.8 h60
  text "24" at 12803.71,5975.8 h60
  text "MIL" at 12988.46,5975.8 h60
  text "0.05mm (2MIL)" at 12432.46,5845.9 h60
  text "MINIMUM ANNULAR RING" at 11408.23,5837.67 h60
  text "EXTERNAL" at 13140.46,5837.67 h60
  text "PER" at 11608.23,5727.55 h60
  text "IPC-D-275 CLASS 2 LEVEL C" at 11828.23,5727.54 h60
  text "MIL, HOLES" at 13316.46,5627.07 h60
  text "+/-" at 12924,5618.48 h60
  text "+/-" at 13778,5618.48 h60
  text "REGISTRATION TOLERANCES:" at 11408.23,5617.42 h60
  text "METAL" at 12608,5617.42 h60
  text "5" at 13184.2,5617.42 h60
  text "3" at 14017.2,5617.42 h60
  text "MIL" at 14133.46,5617.42 h60
  text "HOLE SIZE TOLERANCE (UNLESS OTHERWISE SPECIFIED):" at 11408.23,5519.1 h60
  text "+/-" at 13778,5516.23 h60
  text "3" at 14017.2,5515.17 h60
  text "MIL" at 14133.46,5515.17 h60
  text "MATERIAL:" at 11333.46,5377.52 h60
  text "FR-4 High Tg" at 12319.9,5249 h60
  text "X" at 12175.46,5241.01 h60
  text "FR-408" at 11754.46,5236.49 h60
  text "OTHER" at 13242.46,5236.49 h60
  text "62 MIL (1.6mm) +/-10%" at 12074.56,5093.46 h60
  text "X" at 11954.46,5091.01 h60
  text "THICKNESS:" at 11408.23,5085.24 h60
  text "OTHER" at 13359.46,5085.24 h60
  text "TOLERANCE:" at 11408.23,4946.92 h60
  text "X" at 12256.46,4946.92 h60
  text "ANSI IPC-6012 TYPE 3 CLASS 2" at 12434.48,4946.92 h60
  text "OTHER +/-" at 12434.46,4802.73 h60
  text "BOW & TWIST:" at 11408.23,4657.54 h60
  text "X" at 12256.46,4657.54 h60
  text "ANSI IPC-6012 TYPE 3 CLASS 2" at 12434.48,4657.54 h60
  text "OTHER +/-" at 12434.46,4510.85 h60
  text "DRILLING:" at 11333.46,4380.23 h60
  text "NC_DRILL FILES" at 13094.46,4275.04 h60
  text "REFERENCE:" at 11408.23,4271.1 h60
  text "X" at 12065.46,4271.01 h60
  text "AS SHOWN" at 12243.46,4271.1 h60
  text "X" at 12966.46,4271.1 h60
  text "OTHER" at 13392.46,4128.85 h60
  text "PTH COPPER THICKNESS:" at 11407.91,4125.32 h60
  text "X" at 12547.14,4125.32 h60
  text "20-30 um" at 12675.14,4125.32 h60
  text "BOARD FINISH:" at 11333.46,3977.73 h60
  text "SILKSCREEN:" at 11488.68,3867.6 h60
  text "X" at 12446.46,3867.6 h60
  text "TOP" at 12563.46,3867.6 h60
  text "X" at 12956.46,3867.6 h60
  text "BOTTOM" at 13074.46,3867.6 h60
  text "SILKSCREEN COLOR:" at 11488.68,3712.41 h60
  text "X" at 12445.46,3712.41 h60
  text "WHITE" at 12563.46,3712.41 h60
  text "OTHER" at 13074.46,3712.41 h60
  text "X" at 12576.46,3568.96 h60
  text "GREEN" at 12694.46,3568.96 h60
  text "OTHER" at 13312.46,3568.96 h60
  text "SOLDER RESIST COLOR:" at 11488.68,3562.1 h60
  text "X" at 12576.46,3414.71 h60
  text "MATTE" at 12694.46,3414.71 h60
  text "SEMI-GLOSS" at 13312,3414.07 h60
  text "IMMERSION GOLD (ENIG)" at 12394.46,3241.94 h60
  text "ENEPIG" at 13732,3234.72 h60
  text "SURFACE FINISH:" at 11333.46,3233.72 h60
  text "X" at 12216.46,3233.72 h60
  text "IMM. TIN/SILVER OR EQUIV" at 11663,3096.4 h60
  text "OTHER" at 13094.46,3092.47 h60
  text "ARRAY/PANEL:" at 11333.46,2937.09 h60
  text "CUT AND TRIM PER M1 BOARD OUTLINE" at 12394.46,2928.87 h60
  text "N.C. ROUTE" at 12394.46,2792.9 h60
  text "X" at 13082.46,2792.9 h60
  text "V. SCORE" at 13260.46,2792.9 h60
  text "CERTIFICATION:" at 11333.46,2663.77 h60
  text "MATERIALS AND WORKMANSHIP FOR ALL PCBS" at 12058.46,2663.77 h60
  text "TO MEET OR EXCEED THE REQUIREMENTS OF:" at 12058.46,2569.71 h60
  text "X" at 11695.97,2441.08 h60
  text "ANSI IPC-A-600F CLASS ->" at 11823.96,2441.08 h60
  text "X" at 13471.97,2441.08 h60
  text "2" at 13581.96,2441.08 h60
  text "1" at 13266.96,2439.58 h60
  text "3" at 13935.96,2439.58 h60
  text "X" at 12507.97,2293.39 h60
  text "RoHS" at 12635.96,2293.39 h60
  text "OTHER" at 13280.36,2293.39 h60
  text "PER ORDER" at 13677.42,2293.39 h60
  text "ALL BOARDS MUST MEET OR EXCEED UL94-V0 REQUIREMENTS." at 11361,2139.57 h60
  text "PCB MUST BEAR THE UL94V-0 UL REGISTERED MATERIAL ID NUMBER" at 11361,2023.5 h60
  text "ADDITIONAL REQUIREMENTS:" at 11333.46,1854.08 h60
  text "MICROSECTION:" at 11408.23,1746.95 h60
  text "YES" at 12313.96,1746.95 h60
  text "REQUIRED" at 13175.46,1602.62 h60
  text "BARE BOARD ELEC. TEST:" at 11408.23,1599.76 h60
  text "NONE" at 12713.96,1599.76 h60
  text "X" at 13057.46,1599.76 h60
  text "PER ORDER" at 13767.46,1599.76 h60
  text "XX MIL VIAS REQUIRE NON-CONDUCTIVE FILL AND PLANARIZE" at 11576.38,1394.82 h59
  text "XX MIL VIAS REQUIRE CONDUCTIVE FILL AND PLANARIZE" at 11584.38,1290.84 h60
  text "OUTER XX MIL TRACES REQUIRE 50 OHM SINGLE-ENDED IMPEDANCE" at 11583.39,1127.46 h58
  text "LAYER 2 & 3 (INNER LAYERS) XX MIL WIDE, XX MIL SPACE / TRACES REQUIRE 100 OHM DIFFERENTIAL IMPEDANCE" at 11575.39,891.74 h60
  text ".Layer_Name" at 577,-858.49 h60
M11 Gerber Information:
  lines w10: -292,-930.17 6308,-930.17 ; -292,-726.83 6310,-726.83 ; -292,-523.5 -292,-1133.5 3713,-1133.5 6310,-1133.5 6310,-523.5 -291.5,-523.5 -291.5,-1133.5 1284,-1133.5 ; 2173,-1133.5 2173,-523.5 ; 3440,-726.83 3440,-523.5 ; 4280,-726.83 4280,-523.5 ; 4902,-1140 4902,-937.17
  text "ALL ARTWORK VIEWED FROM TOP SIDE" at -228.5,-655.67 h60
  text "BOARD #:" at 2248,-655.67 h60
  text ".PRJ_Number" at 2793.5,-655.67 h60
  text "REV:" at 3638,-655.67 h60
  text ".PCB_Rev" at 3929.5,-655.67 h60
  text "SVN REV:" at 4476,-655.67 h60
  text ".VersionControl_RevNumber" at 4982,-655.67 h60
  text "LAYER NAME =" at -228.5,-858.49 h60
  text "TID #:" at 2248,-859 h60
  text ".TID" at 2793.5,-859 h60
  text "PLOT NAME =" at -228.5,-1064.34 h60
  text ".plot_File_Name" at 577,-1064.34 h60
  text "GENERATED    :" at 2250,-1064.34 h60
  text ".Print_Date" at 3119.5,-1064.34 h60
  text ".Print_Time" at 3848.5,-1064.34 h60
  text "TEXAS INSTRUMENTS" at 5113,-1064.34 h60
M12 Stackup:
  drawing of 191 lines, arcs and shapes, not listed
  text "Layer" at 9797.84,7830 h60
  text "Name" at 10207.76,7830 h60
  text "Material" at 11137.5,7830 h60
  text "Thickness" at 11997.27,7830 h60
  text "Constant" at 12647.1,7830 h60
  text "Board Layer Stack" at 13216.96,7830 h60
  text "1" at 9797.84,7710 h60
  text "Top Overlay" at 10207.76,7710 h60
  text "2" at 9797.84,7590 h60
  text "Top Solder" at 10207.76,7590 h60
  text "Solder Resist" at 11137.5,7590 h60
  text "0.40mil" at 11997.27,7590 h60
  text "3.5" at 12647.1,7590 h60
  text "3" at 9797.84,7470 h60
  text "Top Layer" at 10207.76,7470 h60
  text "Copper" at 11137.5,7470 h60
  text "1.40mil" at 11997.27,7470 h60
  text "4" at 9797.84,7350 h60
  text "Dielectric1" at 10207.76,7350 h60
  text "FR-4" at 11137.5,7350 h60
  text "59.20mil" at 11997.27,7350 h60
  text "4.8" at 12647.1,7350 h60
  text "5" at 9797.84,7230 h60
  text "Bottom Layer" at 10207.76,7230 h60
  text "Copper" at 11137.5,7230 h60
  text "1.40mil" at 11997.27,7230 h60
  text "6" at 9797.84,7110 h60
  text "Bottom Solder" at 10207.76,7110 h60
  text "Solder Resist" at 11137.5,7110 h60
  text "0.40mil" at 11997.27,7110 h60
  text "3.5" at 12647.1,7110 h60
  text "7" at 9797.84,6990 h60
  text "Bottom Overlay" at 10207.76,6990 h60
  text ".Layer_Name" at 577,-858.49 h60
M13 Component Bodies Top:
  text ".Layer_Name" at 577,-858.49 h60
M14 Component Bodies Bottom:
  text ".Layer_Name" at 577,-858.49 h60
M15 Courtyards Top:
  text ".Layer_Name" at 577,-858.49 h60
M16 Courtyards Bottom:
  text ".Layer_Name" at 577,-858.49 h60
Drill Drawing:
  text ".Layer_Name" at 577,-858.49 h60
M17 Embedded Cavity:
  text ".Layer_Name" at 577,-858.49 h60
M18 Embedded Assembly:
  text ".Layer_Name" at 577,-858.49 h60
M19 Embedded Keepout:
  text ".Layer_Name" at 577,-858.49 h60

## Dimensions
0,0 to 810,0 on M2 Board Dimensions
0,-400 to 1000,-400 on M2 Board Dimensions
0,0 to 0,4415 on M2 Board Dimensions